# Altium PCB PCB1.PcbDoc (part 3 of 4)
Units mm, origin at the board's own origin, x right, y up, seen from the top; angles counter-clockwise.
Board outline 200 x 55 mm, 4 copper layers (Top Layer, Power Layer, GND Layer, Bottom Layer), stack 1.714 mm thick; 402 components, 269 nets, 1338 pads, 752 vias.
Unrouted connection lines stored in the file: 36.
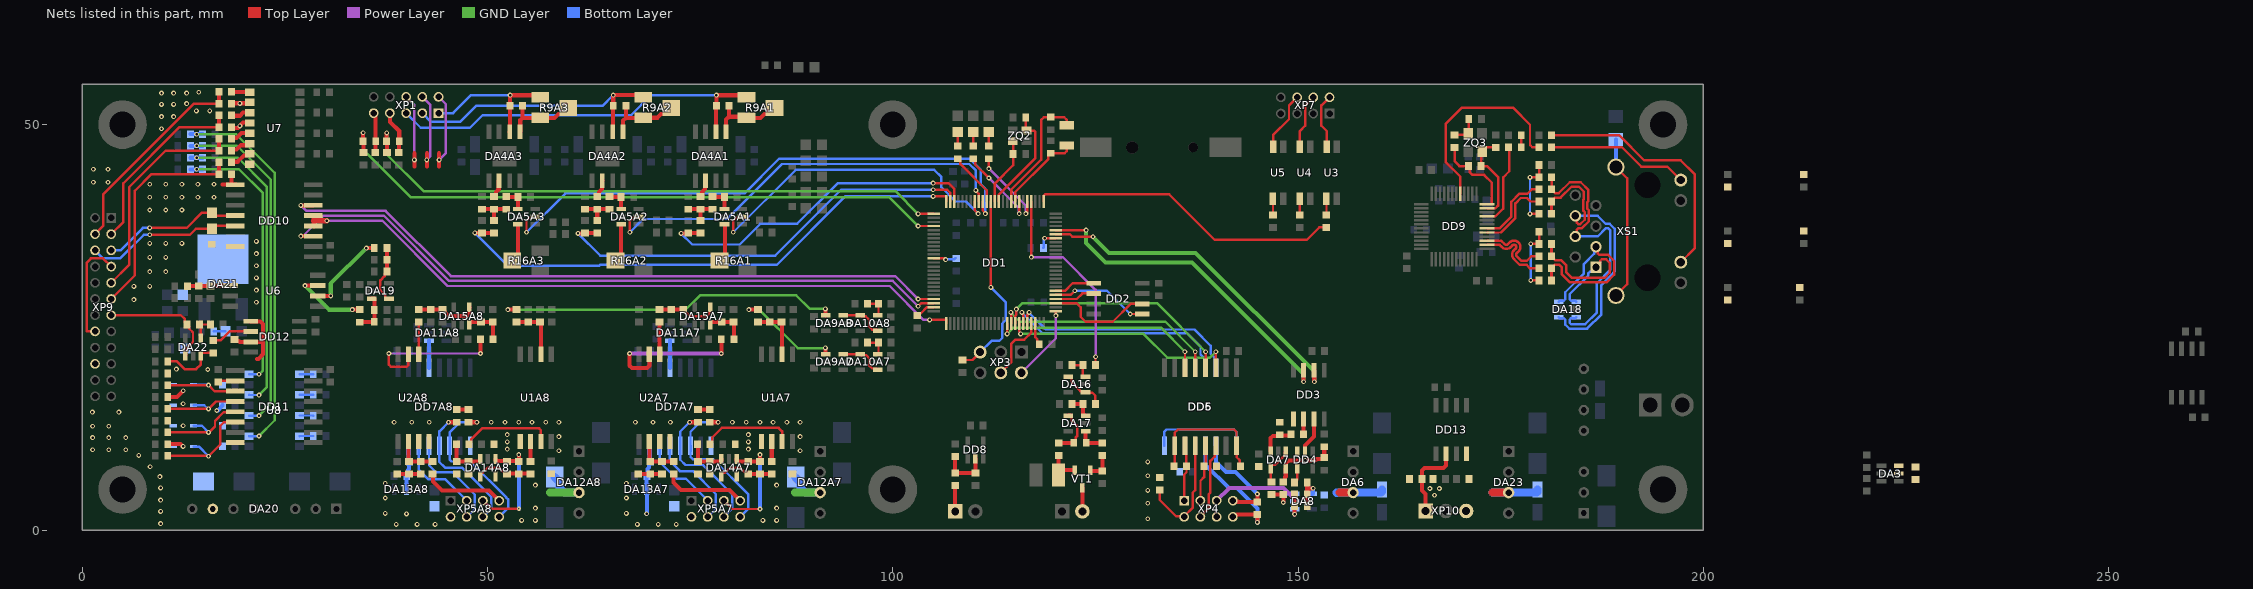
[diagram p5: the nets of this part, all layers, seen from the top]

## Via types
v1: diameter 0.6, hole 0.3, Top Layer to Bottom Layer, tented both sides, 711 vias
v2: diameter 0.6, hole 0.3, Top Layer to Bottom Layer, 36 vias
v3: diameter 0.8, hole 0.4, Top Layer to Bottom Layer, tented both sides, 4 vias
v4: diameter 0.5, hole 0.2, Top Layer to Bottom Layer, tented both sides, 1 vias

## Nets (pads, with @x,y where several pads share a name; then routed paths per layer and width w, separated by ;. In a path a pad name is that pad's centre, name@x,y a point inside that pad or via, vN(x,y) a via of type N, cw(c..) or ccw(c..) an arc to the next point about the centre after c; other vN are vias at no path point) (continued)
GND_DRVA7: C55A7.2 C57A7.2 C59A7.1 C61A7.1 C62A7.2 C64A7.2 C65A7.2 C67A7.2 C68A7.2 DA12A7.3 DA13A7.2 DA14A7.5 DD7A7.9 DD7A7.15 R32A7.2 R37A7.1 R39A7.2 R40A7.2 U1A7.5 U2A7.3 U2A7.4 XP5A7.2 | length 20.3
  Top Layer w0.5: C57A7.2@68.625,6.925 R32A7.2@71.525,6.925 ; R40A7.2@75.975,14.85 R39A7.2@77.425,14.85
  GND Layer w1: 87.965,4.615 DA12A7.3@91.05,4.615
  Bottom Layer w0.5: v1(69.645,2.003) 69.66,2.019 DA13A7.2@69.66,5.025 ; DA13A7.2@69.65,5.025 C67A7.2@69.65,6.65 ; C67A7.2@69.675,6.675 69.769,6.769 69.769,7.542 69.95,7.722 69.95,8.25 C64A7.2@70.125,8.425 ; DD7A7.15@69.975,10.4 70.025,10.35 70.025,8.5 C64A7.2@70.1,8.425
  Bottom Layer w1: C55A7.2@88.015,6.488 88.615,5.888 88.615,5.201 89.201,4.615 DA12A7.3@91.05,4.615
  other v1: 68.5,0.7 71.075,0.7 73.3,0.7 83.975,1.2 85.675,1.2 67.15,2.05 85.675,2.7 67.15,3.95 85.675,5.55 67.15,5.775 88.575,9.775 82.2,9.975 82.2,10.875 88.575,11.525 82.2,11.775 68.25,13.3 70.425,13.3 72.575,13.3 80.225,13.3 81.925,13.3 83.625,13.3 85.25,13.3 86.95,13.3 88.575,13.3
GND_DRVA8: C55A8.2 C57A8.2 C59A8.1 C61A8.1 C62A8.2 C64A8.2 C65A8.2 C67A8.2 C68A8.2 DA12A8.3 DA13A8.2 DA14A8.5 DD7A8.9 DD7A8.15 R32A8.2 R37A8.1 R39A8.2 R40A8.2 U1A8.5 U2A8.3 U2A8.4 XP5A8.2 | length 17.9
  Top Layer w0.5: C57A8.2@38.875,6.925 C59A8.1@40.325,6.925 R32A8.2@41.775,6.925 ; R40A8.2@46.225,14.85 R39A8.2@47.675,14.85
  GND Layer w1: 57.725,4.623 DA12A8.3@61.325,4.623
  Bottom Layer w0.5: DA13A8.2@40.025,5.025 40.025,5.1 C67A8.2@40.025,6.65 ; C67A8.2@40.05,6.725 C67A8.2@40.05,6.675 40.225,6.85 40.225,7.409 40.34,7.524 C64A8.2@40.34,8.36 ; DD7A8.15@40.26,10.4 40.26,8.44 C64A8.2@40.34,8.36 ; C64A8.2@40.375,8.325 C64A8.2@40.34,8.36 ; C64A8.2@40.4,8.425 40.34,8.365 C64A8.2@40.34,8.36
  Bottom Layer w1: C55A8.2@58.3,6.525 58.9,5.925 58.9,5.201 59.486,4.615 DA12A8.3@61.325,4.615
  other v1: 38.75,0.7 41.325,0.7 43.55,0.7 54.225,1.2 55.925,1.2 40.025,2 37.4,2.05 55.925,2.7 37.4,3.95 55.925,5.55 37.4,5.775 58.825,9.775 52.45,9.975 52.45,10.875 58.825,11.525 52.45,11.775 38.5,13.3 40.675,13.3 42.825,13.3 50.475,13.3 52.175,13.3 53.875,13.3 55.5,13.3 57.2,13.3 58.825,13.3
GND_FS: C116.2 C117.2 C118.2 DA23.3 DD13.4 R119.2 XP10.3 | length 7.9
  Top Layer w1: 173.975,4.615 DA23.3@175.975,4.615
  Bottom Layer w1: 173.975,4.615 DA23.3@175.975,4.615 179.425,4.615 179.525,4.715 C118.2@179.525,5
  other v1: 166.825,4.3 166.25,5.125 167.425,5.125
GND_HW: C97.2 C98.2 C107.1 C108.2 C109.2 C110.2 DA20.7 DA21.2 DD10.9 DD10.15 DD11.2 DD11.8 DD12.5 DD12.7 R70.1 R71.1 R73.1 R74.1 R76.1 R77.1 R78.1 R80.1 R111.1 R113.1 R114.1 R115.1 R117.1 R118.1 U7.2 U7.4 U7.6 U7.8 VD4.2 VD5.2 VD6.2 VD7.2 XP9.7 XP9.16 XP9.20 | length 44.6
  Top Layer w0.3: XP9.16@1.6,24.5 0.6,24.5 0.6,33 1.1,33.5 2.6,33.5 XP9.7@3.6,32.5 ; C98.2@16.764,18.4 DD11.2@18.9,18.4 ; R70.1@18.404,52.621 18.534,52.75 U7.2@20.68,52.75 U7.2@20.53,52.6
  Top Layer w0.5: R80.1@10.575,10.6 12.168,10.6 12.448,10.32 v1(12.475,10.32) ; R74.1@10.575,16.4 11.698,16.4 v1(12.477,17.179) ; 17.3,42.6 DD10.9@18.475,42.6 ; R78.1@18.425,43.6 18.425,42.65 DD10.9@18.475,42.6 ; R76.1@18.425,46.65 18.425,46.75 18.6,46.925 19.075,46.925 19.615,47.465 20.475,47.465 U7.6@20.68,47.67 ; R73.1@18.425,49.6 19.223,49.6 19.88,50.257 20.633,50.257 U7.4@20.68,50.21 ; R70.1@18.425,52.6 U7.2@20.53,52.6 ; C108.2@18.8,23.5 18.975,23.325 19.328,23.325 19.453,23.2 DD12.7@20.8,23.2 22.3,23.2 ; DD10.9@19,42.6 DD10.9@18.475,42.6 ; DD12.5@20.8,25.75 20.85,25.7 22.007,25.7 22.3,25.407 22.3,23.2 ; 21.582,21.125 21.741,21.125 22.3,21.684 22.3,23.2
  Bottom Layer w0.3: C109.2@16.25,24.5 17.665,24.5 C107.1@17.7,24.535
  Bottom Layer w0.5: v1(16.621,14.75) 16.64,14.769 16.744,14.769 17.325,15.35 R115.1@17.325,15.4
  other v1: 9.7,0.8 9.7,2.3 9.7,3.7 9.7,5.2 9.6,6.6 8.4,7.8 7,9.2 1.3,9.9 3.3,9.9 5.4,9.9 1.3,11.4 3.3,11.4 5.4,11.4 1.3,12.8 3.3,12.8 12.475,12.86 1.283,14.55 4.537,14.55 12.475,15.575 15.5,19.8 11.632,19.845 21.5,28.1 6.4,28.425 21.5,29.6 6.4,30.05 8.35,30.05 21.5,31.1 8.35,31.875 10.331,31.875 21.5,32.6 8.35,33.625 10.331,33.625 21.5,34.1 8.35,35.35 10.331,35.35 12.312,35.35 21.5,35.6 8.35,39.475 10.331,39.475 12.312,39.475 8.35,41.05 10.331,41.05 12.312,41.05 14.294,41.05 16.275,41.05 8.35,42.65 10.331,42.65 12.312,42.65 14.294,42.65 16.275,42.65 1.4,42.9 3.2,42.9 1.4,44.5 3.2,44.5 9.8,49.5 19.475,49.85 9.8,51 11.3,51 14.1,51.7 15.75,51.7 9.8,52.5 11.3,52.5 12.9,52.6 19.475,52.625 9.8,53.9 11.3,53.9 12.9,53.9 14.4,54
GND_PS: C39.2 C42.2 C43.2 C44.2 C45.2 C46.2 C47.2 C48.2 DA6.3 DA7.5 DA8.2 DD3.5 DD4.3 DD5.2 DD5.8 DD6.9 DD6.16 R21.1 R24.1 R25.2 R26.1 XP4.6 | length 45.4
  Top Layer w0.3: R21.1@134.681,7.875 134.776,7.971 DD5.2@134.776,10.41 134.776,12.013 135.163,12.4 142.124,12.4 142.396,12.128 DD5.8@142.396,10.41 142.424,10.382 142.424,8.985 142.781,8.628 C46.2@142.781,8.325 ; C46.2@142.881,8.15 C46.2@143.156,7.875
  Top Layer w0.5: R25.2@148.175,5.925 148.225,5.925 148.4,6.1 148.4,6.535 148.475,6.61 148.475,7.55 DA7.5@148.5,7.575 ; DA7.5@148.525,7.6 148.525,8.275 148.85,8.6 152.116,8.6 152.266,8.75 153.05,8.75 C43.2@153.225,8.925 C39.2@153.225,10.275
  Top Layer w1: 155.081,4.62 DA6.3@156.781,4.62
  Bottom Layer w0.3: DD6.16@133.506,10.41 133.506,12.15 133.756,12.4 142.124,12.4 142.396,12.128 DD6.9@142.396,10.41
  Bottom Layer w1: 154.75,4.6 154.77,4.62 DA6.3@156.781,4.62 160.25,4.62 160.35,4.72 C45.2@160.35,5
  other v1: 131.456,1.4 131.456,3.3 131.456,4.9 131.456,6.7 131.456,8.4 150.875,8.6
GUIDE_LAS: DD1.4 R43.1 | length 25.7
  Top Layer w0.3: v1(117.1,33.675) DD1.4@117.1,40.525 ; R43.1@125,20.35 125.012,20.362 125.012,21.362 v1(125.025,21.375)
  Power Layer w0.3: v1(117.1,33.675) 120.966,33.675 125.025,29.616 v1(125.025,21.375)
IL1_HW: R70.2 R84.1 XP9.4 | length 25.8
  Top Layer w0.3: XP9.4@1.6,36.5 2.6,37.5 2.6,41.376 13.824,52.6 R70.2@16.949,52.6
  Top Layer w0.5: R70.2@16.875,52.6 R84.1@16.875,54.1
IL2_HW: R73.2 R85.1 XP9.3 | length 23
  Top Layer w0.3: XP9.3@3.6,36.5 5.1,38 5.1,42.77 12.03,49.7 R73.2@16.875,49.7
  Top Layer w0.5: R73.2@16.875,49.6 R85.1@16.875,51.1
KEY_HW: R76.2 R86.1 XP9.9 | length 26.9
  Top Layer w0.3: XP9.9@3.6,30.5 5.8,32.7 5.8,42.279 10.321,46.8 R76.2@16.875,46.8
  Top Layer w0.5: R76.2@16.875,46.8 R86.1@16.875,48.1
LED1: DD1.15 R6.1 | length 6.8
  Top Layer w0.3: R6.1@108.025,45.8 108.068,45.8 108.343,45.525 108.343,45.144 111.6,41.887 DD1.15@111.6,40.525
LED2: DD1.7 R7.1 | length 10.6
  Top Layer w0.3: R7.1@109.935,45.8 110.173,45.562 110.173,45.102 v1(111.85,43.425) ; v1(115.6,39.025) DD1.7@115.6,40.525
  Power Layer w0.3: v1(111.85,43.425) 115.543,39.732 115.543,39.082 v1(115.6,39.025)
LED3: DD1.5 R8.1 | length 10.2
  Top Layer w0.3: v1(111.85,44.575) R8.1@111.85,45.8 ; v1(116.425,39.025) 116.425,39.106 116.6,39.281 DD1.5@116.6,40.525
  Power Layer w0.3: v1(111.85,44.575) 116.425,40 v1(116.425,39.025)
LNKn: DD9.17 R64.2 | length 25.2
  Top Layer w0.3: DD9.17@170,41.5 170,43.6 168.2,45.4 168.2,50.1 170.2,52.1 176.5,52.1 178.6,50 178.6,47.5 178.888,47.212 R64.2@179.725,47.212
MEM_CS: DD1.81 DD2.1 | length 5.1
  Top Layer w0.3: DD1.81@120.125,29.5 121.225,29.5 122.171,30.446 DD2.1@124.796,30.446
MEM_MISO: DD1.79 DD2.2 | length 5
  Top Layer w0.3: DD1.79@120.125,28.5 122.699,28.5 123.394,29.196 DD2.2@124.796,29.196
MEM_MOSI: DD1.80 DD2.5 | length 12.1
  Top Layer w0.3: DD1.80@120.125,29 121.939,29 122.464,29.525 v1(122.475,29.525) ; v1(129.296,26.646) DD2.5@130.796,26.646
  Bottom Layer w0.3: v1(122.475,29.525) 126.416,29.525 v1(129.296,26.646)
MEM_SCLK: DD1.78 DD2.6 | length 13.2
  Top Layer w0.3: DD1.78@120.125,28 122.662,28 123.178,27.484 123.178,26.306 123.795,25.688 127.138,25.688 129.346,27.896 DD2.6@130.796,27.896
MP_EN_HW: R78.2 R87.1 XP9.11 | length 27.3
  Top Layer w0.3: XP9.11@3.6,28.5 6.5,31.4 6.5,41.83 8.57,43.9 R78.2@16.875,43.9
  Top Layer w0.5: R78.2@16.875,43.8 R78.2@16.875,43.9 R87.1@16.875,45.35
NetC7_1: C7.1 DA3.5
NetC7_2: C7.2 DA3.6
NetC16_1: C16.1 DD1.49 | length 2.5
  Top Layer w0.3: C16.1@103.025,26.45 103.3,26.725 103.451,26.725 104.226,27.5 DD1.49@105.075,27.5
NetC18_1: C18.1 DD1.73 | length 2.8
  Top Layer w0.3: DD1.73@117.6,25.475 117.6,23.777 117.808,23.569 117.808,23.167 C18.1@118.075,22.9
NetC27A1_1: C27A1.1 DA4A1.1 R9A1.2 R9A1.3 | length 9.5
  Top Layer w0.5: DA4A1.1@79.45,49.105 79.45,50.63 79.8,50.98 ; C27A1.1@79.8,52.325 79.8,50.98 ; R9A1.2@85.4,52.075 84.65,51.325 84.185,51.325 83.71,50.85 R9A1.3@81.95,50.85 81.82,50.98 79.8,50.98
NetC27A2_1: C27A2.1 DA4A2.1 R9A2.2 R9A2.3 | length 9.5
  Top Layer w0.5: DA4A2.1@66.716,49.105 66.724,49.113 66.724,50.499 67.075,50.85 ; C27A2.1@67.075,52.325 67.075,50.85 ; R9A2.2@72.675,52.075 71.925,51.325 71.425,51.325 70.959,50.859 69.234,50.859 R9A2.3@69.225,50.85 67.075,50.85
NetC27A3_1: C27A3.1 DA4A3.1 R9A3.2 R9A3.3 | length 9.5
  Top Layer w0.5: DA4A3.1@54,49.105 54.05,49.155 54.05,50.575 54.12,50.645 54.19,50.715 54.35,50.875 ; C27A3.1@54.35,52.325 54.35,50.875 ; R9A3.2@59.975,52.075 59.225,51.325 58.775,51.325 58.3,50.85 R9A3.3@56.525,50.85 54.35,50.85 54.35,50.875
NetC33A1_1: C33A1.1 DA5A1.1 R15A1.2 | length 3.1
  Top Layer w0.5: R15A1.2@77.775,41.125 77.8,41.1 79.2,41.1 C33A1.1@79.225,41.075 79.225,39.625 DA5A1.1@79.25,39.6 DA5A1.1@79.4,39.6
NetC33A2_1: C33A2.1 DA5A2.1 R15A2.2 | length 3.1
  Top Layer w0.5: R15A2.2@65.05,41.125 65.075,41.1 66.475,41.1 C33A2.1@66.5,41.075 66.5,39.625 66.525,39.6 DA5A2.1@66.65,39.6
NetC33A3_1: C33A3.1 DA5A3.1 R15A3.2 | length 3
  Top Layer w0.5: R15A3.2@52.325,41.125 52.35,41.1 C33A3.1@53.9,41.1 ; DA5A3.1@53.775,39.625 C33A3.1@53.775,41.075
NetC42_1: C42.1 DA7.3 R19.2 | length 4.5
  Top Layer w0.5: DA7.3@146.6,9.725 146.6,11.329 146.893,11.621 147.596,11.621 C42.1@147.725,11.75 ; C42.1@147.575,11.65 149.1,11.65 R19.2@149.125,11.675
NetC49_1: C49.1 DA8.4 R23.1 R27.2 | length 4.3
  Top Layer w0.5: C49.1@151.125,2.975 R23.1@151.125,5.868 ; 151.168,5.15 v1(151.85,5.15)
  Bottom Layer w0.5: DA8.4@151.725,4.475 151.806,4.475 151.831,4.5 151.831,5.131 v1(151.85,5.15)
NetC49_2: C49.2 DA8.1 R27.1 XP4.5 | length 15.8
  Top Layer w0.5: v1(149.575,1.95) C49.2@149.575,2.975 R27.1@149.575,4.425
  Power Layer w0.5: XP4.5@139.95,3.625 141.509,5.184 148.223,5.184 149.575,3.832 v1(149.575,1.95)
  Bottom Layer w0.5: v1(149.575,1.95) DA8.1@149.575,2.575
NetC50A7_1: C50A7.1 DA10A7.3 R28A7.2 | length 2.8
  Top Layer w0.3: C50A7.1@96.892,23.125 R28A7.2@98.242,23.125 98.242,21.8 DA10A7.3@98.142,21.7
NetC50A8_1: C50A8.1 DA10A8.3 R28A8.2 | length 2.8
  Top Layer w0.3: C50A8.1@96.892,27.9 R28A8.2@98.242,27.9 98.242,26.575 DA10A8.3@98.142,26.475
NetC58A7_2: C58A7.2 R29A7.1 R31A7.1 U1A7.2 | length 6.9
  Top Layer w0.5: R29A7.1@83.375,25.65 86.3,25.65 86.35,25.6 U1A7.2@86.35,21.675
NetC58A8_2: C58A8.2 R29A8.1 R31A8.1 U1A8.2 | length 6.9
  Top Layer w0.5: R29A8.1@53.609,25.638 55.059,25.638 56.509,25.638 56.6,25.547 U1A8.2@56.6,21.675
NetC59A7_2: C59A7.2 R30A7.1 R32A7.1 U2A7.2 | length 5.5
  Top Layer w0.5: U2A7.2@69.975,11.1 69.975,8.475 71.425,8.475 R30A7.1@72.875,8.475
NetC59A8_2: C59A8.2 R30A8.1 R32A8.1 U2A8.2 | length 5.4
  Top Layer w0.5: U2A8.2@40.26,10.925 40.293,10.893 40.293,8.507 C59A8.2@40.325,8.475 R30A8.1@43.225,8.475
NetC65A7_1: C65A7.1 DA14A7.3 R33A7.2 R37A7.2 | length 5.2
  Top Layer w0.5: R33A7.2@75.925,10.575 75.975,10.525 C65A7.1@75.975,8.475 R37A7.2@77.425,8.475 78.725,8.475 78.85,8.6 DA14A7.3@78.85,8.76
NetC65A8_1: C65A8.1 DA14A8.3 R33A8.2 R37A8.2 | length 5.3
  Top Layer w0.5: R33A8.2@46.175,10.575 46.2,10.55 46.2,8.5 C65A8.1@46.225,8.475 R37A8.2@47.675,8.475 49.075,8.475 49.1,8.5 DA14A8.3@49.1,8.76
NetC66A7_1: C66A7.1 DA15A7.3 R34A7.2 R38A7.1 | length 5.2
  Top Layer w0.5: DA15A7.3@77.475,25.325 77.475,25.525 77.6,25.65 R38A7.1@78.9,25.65 C66A7.1@80.35,25.65 80.4,25.6 R34A7.2@80.4,23.55
NetC66A8_1: C66A8.1 DA15A8.3 R34A8.2 R38A8.1 | length 5.2
  Top Layer w0.5: DA15A8.3@47.775,25.325 47.775,25.525 47.9,25.65 R38A8.1@49.2,25.65 C66A8.1@50.65,25.65 50.7,25.6 R34A8.2@50.7,23.55
NetC70A7_1: C70A7.1 DA14A7.4 R35A7.2 R41A7.1 | length 7.2
  Top Layer w0.3: DA14A7.4@78.85,6.61 78.85,6.935 78.975,7.06 79.3,7.06 79.93,7.69 81.171,7.69 81.661,7.2 81.9,7.2 R41A7.1@82.175,6.925
  Top Layer w0.5: R41A7.1@82.175,6.925 C70A7.1@83.625,6.925 R35A7.2@85.075,6.925
NetC70A7_2: C70A7.2 DA14A7.1 R41A7.2 XP5A7.5 | length 15.5
  Top Layer w0.3: XP5A7.5@79.175,3.625 80.2,2.6 v1(83.625,2.6)
  Top Layer w0.5: DA14A7.1@80.75,8.76 80.75,8.6 80.875,8.475 R41A7.2@82.175,8.475 C70A7.2@83.625,8.475 v1(83.625,9.3)
  Bottom Layer w0.5: v1(83.625,2.6) v1(83.625,9.3)
NetC70A8_1: C70A8.1 DA14A8.4 R35A8.2 R41A8.1 | length 7.2
  Top Layer w0.3: DA14A8.4@49.1,6.61 49.1,6.935 49.225,7.06 49.435,7.06 50.075,7.7 51.419,7.7 51.894,7.225 52.15,7.225 R41A8.1@52.425,6.95
  Top Layer w0.5: R41A8.1@52.425,6.95 53.875,6.95 R35A8.2@55.325,6.95
NetC70A8_2: C70A8.2 DA14A8.1 R41A8.2 XP5A8.5 | length 15.4
  Top Layer w0.3: XP5A8.5@49.45,3.625 50.45,2.625 v4(53.875,2.625)
  Top Layer w0.5: DA14A8.1@51,8.76 51,8.625 51.125,8.5 52.425,8.5 53.875,8.5 v1(53.875,9.3)
  Bottom Layer w0.5: v4(53.875,2.625) v1(53.875,9.3)
NetC71A7_1: C71A7.1 DA15A7.4 R36A7.2 R42A7.2 | length 7.5
  Top Layer w0.3: R42A7.2@74.191,27.2 74.466,26.925 74.466,26.875 74.972,26.369 77.069,26.369 77.369,26.669 77.369,27.369 DA15A7.4@77.475,27.475
  Top Layer w0.5: R36A7.2@71.241,27.2 C71A7.1@72.691,27.2 R42A7.2@74.191,27.2
NetC71A8_1: C71A8.1 DA15A8.4 R36A8.2 R42A8.2 | length 7.5
  Top Layer w0.5: R36A8.2@41.548,27.188 C71A8.1@42.998,27.188 ; C71A8.1@43.01,27.2 R42A8.2@44.5,27.2 ; R42A8.2@44.45,27.2 R42A8.2@44.5,27.2 ; DA15A8.4@47.775,27.475 47.75,27.45 47.75,26.718 47.457,26.425 45.225,26.425 44.675,26.975 44.675,27.025 R42A8.2@44.5,27.2
NetC72_1: C72.1 DA16.3 R43.2 | length 3.1
  Top Layer w0.3: C72.1@122.075,20.35 123.425,20.35 123.425,19.038 123.55,18.913 DA16.3@123.787,18.913
NetC75_1: C75.1 DA17.1 R46.1 | length 3.5
  Top Layer w0.5: DA17.1@123.8,12.2 123.8,10.828 C75.1@123.871,10.757 R46.1@125.85,10.757 R46.1@125.871,10.757
NetC75_2: C75.2 DA17.4 R47.1 | length 6.1
  Top Layer w0.3: DA17.4@121.65,14.207 121.975,14.207 122.1,14.082 122.1,13.907 122.1,13.5 122.731,12.869 122.731,11.583 122.596,11.447 122.596,11.032 C75.2@122.321,10.757
  Top Layer w0.5: R47.1@120.471,10.757 C75.2@122.321,10.757
NetC76_1: C76.1 DD8.2 R53.2 R54.1 | length 6.3
  Top Layer w0.5: R54.1@107.7,9.05 R53.2@107.7,7.05 C76.1@110.2,7.05 DD8.2@110.2,8.8
NetC79_1: C79.1 XS1.13 XS1.14 | length 20.4
  Top Layer w0.3: XS1.13@189.2,28.932 190.6,30.332 190.6,43.372 XS1.14@189.2,44.772
  Bottom Layer w0.5: XS1.14@189.2,44.772 C79.1@189.2,48.2
NetC81_1: C81.1 R55.2 R56.2 | length 8.1
  Top Layer w0.3: v1(178.7,30.8) 179.703,30.8 R55.2@179.725,30.778 ; v1(178.7,35.3) 179.703,35.3 R56.2@179.725,35.278 C81.1@179.725,36.778
  Bottom Layer w0.3: v1(178.7,30.8) v1(178.7,35.3)
NetC82_1: C82.1 R57.2 R58.2 | length 8.3
  Top Layer w0.3: v1(178.6,39) 179.7,39 R57.2@179.725,39.025 ; v1(178.6,43.5) 179.7,43.5 R58.2@179.725,43.525 C82.1@179.725,45.025
  Bottom Layer w0.3: v1(178.6,39) v1(178.6,43.5)
NetC86_1: C86.1 R68.2 ZQ3.3 | length 3.6
  Top Layer w0.3: R68.2@169.3,48.75 170.825,48.75 ZQ3.3@170.975,48.9 171.05,48.975 C86.1@171.05,50.7
NetC96_2: C96.2 R75.1 R79.1 U6.2 | length 5.3
  Top Layer w0.5: R75.1@12.991,30.075 13.041,30.125 R79.1@14.341,30.125 ; R79.1@14.391,30.125 C96.2@15.841,30.125 ; C96.2@15.866,30.15 U6.2@18.3,30.15
NetC101_1: C101.1 DA19.3 R92.2 R96.1 | length 5
  Top Layer w0.5: R92.2@34.25,25.632 34.275,25.657 36.025,25.657 C101.1@36.05,25.682 R96.1@36.05,27.132 36.05,28.532 36.025,28.557 DA19.3@35.725,28.557
NetC104_1: C104.1 DA19.4 R95.2 R97.2 | length 7.2
  Top Layer w0.3: R97.2@37.6,31.882 37.325,31.607 37.325,31.316 36.8,30.791 36.8,29.532 37.425,28.907 37.425,28.682 37.55,28.557 DA19.4@37.875,28.557
  Top Layer w0.5: R97.2@37.6,31.882 C104.1@37.6,33.332 R95.2@37.6,34.782
NetC111_1: C111.1 DA22.3 R102.2 | length 7.4
  Top Layer w0.3: C111.1@10.575,20.8 11.7,20.8 12.65,19.85 14.075,19.85 14.658,20.433 DA22.3@14.658,21.5 ; DA22.3@14.658,21.725 14.783,21.85 R102.2@16.2,21.85
NetDA4A1_6: DA4A1.6 R12A1.1 | length 2.2
  Top Layer w0.5: R12A1.1@76.358,41.158 76.5,41.3 76.5,41.701 76.85,42.051 76.85,43.055 DA4A1.6@76.9,43.105
NetDA4A2_6: DA4A2.6 R12A2.1 | length 2.3
  Top Layer w0.5: R12A2.1@63.55,41.125 63.725,41.3 63.775,41.3 63.775,41.701 64.116,42.042 64.116,43.056 DA4A2.6@64.166,43.106
NetDA4A3_6: DA4A3.6 R12A3.1 | length 2.3
  Top Layer w0.5: R12A3.1@50.825,41.125 50.875,41.125 51.05,41.3 51.05,41.687 51.4,42.037 51.4,43.055 DA4A3.6@51.45,43.105
NetDA5A1_3: DA5A1.3 R16A1.2 | length 4.1
  Top Layer w0.5: R16A1.2@79,33.675 79.3,33.975 DA5A1.3@79.3,37.7
NetDA5A2_3: DA5A2.3 R16A2.2 | length 4.8
  Top Layer w0.5: R16A2.2@65.836,33.186 66.5,33.85 DA5A2.3@66.5,37.7
NetDA5A3_3: DA5A3.3 R16A3.2 | length 4.8
  Top Layer w0.5: R16A3.2@53.075,33.25 53.175,33.25 53.75,33.825 DA5A3.3@53.75,37.7
NetDA7_1: DA7.1 DA7.4 R20.2 | length 4.9
  Top Layer w0.3: R20.2@146.725,5.925 146.6,6.05 146.6,7.9 146.725,8.025 147.149,8.025 148.375,9.251 148.375,9.6 DA7.1@148.5,9.725
NetDA8_3: DA8.3 R20.1 R25.1 | length 4.6
  Top Layer w0.5: R20.1@146.625,4.375 R20.1@146.725,4.375 R25.1@148.125,4.375 ; v1(148.175,3.4) R25.1@148.175,4.375
  Bottom Layer w0.3: v1(148.175,3.4) 148.175,3.9 148.707,4.432 149.532,4.432 DA8.3@149.575,4.475
NetDA9A7_3: DA9A7.3 DA10A7.1 DA10A7.4 | length 5.7
  Top Layer w0.3: DA9A7.3@93.75,21.7 DA10A7.4@95.992,21.7 96.117,21.575 96.717,21.575 97.077,21.215 97.077,20.315 97.467,19.925 98.017,19.925 DA10A7.1@98.142,19.8
NetDA9A7_4: DA9A7.4 R29A7.2 | length 13.4
  Top Layer w0.5: v1(82.25,27.2) R29A7.2@83.375,27.2 ; v1(91.7,22.475) 91.719,22.456 91.719,21.725 91.744,21.7 DA9A7.4@91.75,21.7
  GND Layer w0.3: v1(82.25,27.2) 83.524,27.2 88.299,22.425 91.65,22.425 v1(91.7,22.475)
NetDA9A8_3: DA9A8.3 DA10A8.1 DA10A8.4 | length 5.7
  Top Layer w0.3: DA9A8.3@93.75,26.475 DA10A8.4@95.992,26.475 ; DA10A8.4@95.992,26.475 96.117,26.35 96.667,26.35 97.067,25.95 97.067,25.1 97.467,24.7 98.017,24.7 DA10A8.1@98.142,24.575
NetDA9A8_4: DA9A8.4 R29A8.2 | length 42.5
  Top Layer w0.5: v1(52.525,27.2) R29A8.2@53.6,27.2 ; v1(91.7,27.275) 91.712,27.263 91.712,26.487 DA9A8.4@91.725,26.475
  GND Layer w0.3: v1(52.525,27.2) 74.471,27.2 76.221,28.95 88.1,28.95 89.775,27.275 v1(91.7,27.275)
NetDA11A7_4: DA11A7.4 DD7A7.4 | length 3.4
  Bottom Layer w0.5: DD7A7.4@72.515,20 DA11A7.4@72.515,23.36
NetDA11A8_4: DA11A8.4 DD7A8.4 | length 3.4
  Bottom Layer w0.5: DD7A8.4@42.8,20 DA11A8.4@42.8,23.375
NetDA16_1: DA16.1 DA16.4 R44.1 | length 5.7
  Top Layer w0.3: DA16.4@121.637,18.913 121.954,18.913 122.079,18.788 122.079,18.196 123.137,17.138 123.662,17.138 DA16.1@123.787,17.013 123.868,16.933 124.618,16.933 124.987,16.563 ; R44.1@125,15.55 125,16.563
NetDA17_3: DA17.3 R44.2 R45.1 | length 3.1
  Top Layer w0.5: R45.1@122.1,15.55 R44.2@123.45,15.55 123.45,14.125 123.475,14.1 DA17.3@123.8,14.1
NetDA22_4: DA22.4 R112.2 R116.1 | length 3.2
  Top Layer w0.3: DA22.4@14.658,23.65 14.658,25.197 R116.1@14.505,25.35 15.949,25.35 R112.2@15.966,25.333
NetDD1_37: DD1.37 R4.1 | length 2.8
  Top Layer w0.3: DD1.37@105.075,33.5 106.302,33.5 106.452,33.35 v1@106.529,33.35
  Bottom Layer w0.3: v1@106.529,33.35 106.586,33.407 107.611,33.407 R4.1@107.759,33.556
  other v1: 106.525,33.35
NetDD1_94: DD1.94 R5.1 | length 2.7
  Top Layer w0.3: v1(118.725,36) 119.5,36 DD1.94@120.125,36
  Bottom Layer w0.3: R5.1@118.575,34.8 118.65,34.875 118.65,35.925 v1(118.725,36)
NetDD3_6: DD3.6 R19.1 | length 2
  Top Layer w0.5: R19.1@150.675,11.7 DD3.6@150.675,13.7
NetDD3_7: DD3.7 DD4.2 | length 4.4
  Top Layer w0.5: DD4.2@150.85,9.725 150.875,9.75 150.875,10.45 151.975,11.55 DD3.7@151.975,13.7
NetDD4_4: DD4.4 R23.2 | length 1.8
  Top Layer w0.3: R23.2@149.625,5.925 149.9,6.2 DD4.4@149.9,7.575
NetDD5_3: DD5.3 R21.2 XP4.1 | length 6.9
  Top Layer w0.3: XP4.1@135.956,3.7 135.956,6.85 136.231,7.124 R21.2@136.231,7.875 136.184,7.922 136.184,10.272 DD5.3@136.046,10.41
NetDD5_4: DD5.4 R24.2 XP4.2 | length 14.4
  Top Layer w0.3: R24.2@132.931,4.95 132.931,3.725 134.956,1.7 135.956,1.7 136.98,2.724 136.98,4.599 137.316,4.935 DD5.4@137.316,10.41
NetDD5_5: DD5.5 R26.2 XP4.3 | length 7
  Top Layer w0.3: XP4.3@137.956,3.7 137.956,6.075 138.406,6.525 R26.2@138.406,7.875 138.586,8.055 DD5.5@138.586,10.41
NetDD5_6: DD5.6 XP4.4 | length 9.5
  Top Layer w0.3: XP4.4@137.956,1.7 138.956,2.7 138.956,4.4 139.185,4.629 139.185,8.527 139.706,9.049 139.706,10.26 DD5.6@139.856,10.41
NetDD6_11: DD6.11 R22.1 XP4.7 | length 12.8
  Top Layer w0.5: XP4.7@141.95,3.625 142.084,3.491 142.577,3.491 142.593,3.475 R22.1@144.925,3.475 ; R22.1@144.975,3.475 v1(144.975,4.45)
  Bottom Layer w0.5: DD6.11@139.856,10.41 DD6.11@139.856,10.4 139.856,8.375 141.081,7.15 142.275,7.15 v1(144.975,4.45)
NetDD6_12: DD6.12 R22.2 XP4.8 | length 16.8
  Top Layer w0.5: XP4.8@141.95,1.625 142.139,1.625 142.439,1.925 R22.2@144.975,1.925 v1(144.975,0.95)
  Bottom Layer w0.5: DD6.12@138.586,10.41 DD6.12@138.586,10.4 138.586,8.043 141.455,5.175 142.45,5.175 144.975,2.65 v1(144.975,0.95)
NetDD7A7_11: DD7A7.11 R39A7.1 XP5A7.8 | length 20.3
  Top Layer w0.5: R39A7.1@77.425,13.3 v1(78.45,13.3)
  Bottom Layer w0.3: DD7A7.11@75.055,9.727 75.055,9.025 75.341,8.74 77.86,8.74 82.197,4.403 82.197,2.647 XP5A7.8@81.175,1.625 ; DD7A7.11@75.055,10.4 75.055,12.122 76.233,13.3 v1(78.45,13.3) ; DD7A7.11@75.085,9.727 DD7A7.11@75.085,10.4
NetDD7A7_12: DD7A7.12 R40A7.1 XP5A7.6 | length 17.5
  Top Layer w0.5: v1(74.95,13.3) R40A7.1@75.975,13.3
  Bottom Layer w0.3: v1(74.95,13.3) 73.785,12.135 DD7A7.12@73.785,10.4 73.785,8.665 74.425,8.025 76.575,8.025 80.188,4.412 80.188,2.638 XP5A7.6@79.175,1.625
NetDD7A7_13: DD7A7.13 XP5A7.4 | length 12.7
  Bottom Layer w0.3: DD7A7.13@72.515,10.6 72.515,8.51 73.75,7.275 75.35,7.275 78.175,4.45 78.175,2.625 XP5A7.4@77.175,1.625
NetDD7A7_14: DD7A7.14 XP5A7.3 | length 10.1
  Bottom Layer w0.3: DD7A7.14@71.245,10.6 71.245,8.422 73.342,6.325 74.475,6.325 XP5A7.3@77.175,3.625
NetDD7A8_11: DD7A8.11 R39A8.1 XP5A8.8 | length 20.1
  Top Layer w0.5: R39A8.1@47.675,13.3 v1(48.7,13.3)
  Bottom Layer w0.3: v1(48.7,13.3) 46.599,13.3 45.34,12.041 45.34,8.71 45.594,8.456 47.892,8.456 52.35,3.998 52.35,3.981 52.55,3.781 52.55,2.725 XP5A8.8@51.45,1.625
NetDD7A8_12: DD7A8.12 R40A8.1 XP5A8.6 | length 17.5
  Top Layer w0.5: v1(45.2,13.3) R40A8.1@46.225,13.3
  Bottom Layer w0.3: v1(45.2,13.3) 44.07,12.17 44.07,10.42 44.05,10.4 44.05,8.425 44.775,7.7 46.883,7.7 50.45,4.133 50.45,2.625 XP5A8.6@49.45,1.625
NetDD7A8_13: DD7A8.13 XP5A8.4 | length 12.6
  Bottom Layer w0.3: DD7A8.13@42.801,10.299 42.801,7.999 43.675,7.125 45.675,7.125 48.45,4.35 48.45,2.625 XP5A8.4@47.45,1.625
NetDD7A8_14: DD7A8.14 XP5A8.3 | length 10.4
  Bottom Layer w0.3: DD7A8.14@41.53,10.4 41.53,7.47 42.75,6.25 44.825,6.25 XP5A8.3@47.45,3.625
NetDD9_9: DD9.9 R67.2 | length 10.2
  Top Layer w0.3: DD9.9@173.3,38.7 174.05,38.7 174.345,38.7 175.3,39.655 175.3,43.5 176.051,44.251 R67.2@176.051,47.126
NetDD11_3: DD11.3 R88.2 VD7.1 | length 10.5
  Top Layer w0.3: R88.2@10.575,17.85 10.6,17.875 v1(15.6,17.875) 16.375,17.1 18.87,17.1 DD11.3@18.9,17.13
  Bottom Layer w0.3: VD7.1@13.75,17.94 13.782,17.908 15.567,17.908 v1(15.6,17.875)
NetDD11_4: DD11.4 R82.2 VD6.1 | length 10.7
  Top Layer w0.3: R82.2@10.575,14.95 v1(15.6,14.95) 16.51,15.86 DD11.4@18.9,15.86
  Bottom Layer w0.3: VD6.1@13.75,15.4 15.069,15.4 15.519,14.95 v1(15.6,14.95)
NetDD11_5: DD11.5 R89.2 VD5.1 | length 12
  Top Layer w0.3: R89.2@10.575,12.05 15.681,12.05 16.4,12.769 16.4,13.47 17.476,14.546 18.856,14.546 DD11.5@18.9,14.59
  Bottom Layer w0.3: VD5.1@13.75,12.86 14.79,12.86 v1(15.6,12.05)
NetDD11_6: DD11.6 R83.2 VD4.1 | length 13.8
  Top Layer w0.3: R83.2@10.575,9.15 15.55,9.15 v1(15.6,9.1) 17.05,10.55 17.05,12.85 17.476,13.276 18.856,13.276 DD11.6@18.9,13.32
  Bottom Layer w0.3: VD4.1@13.75,10.3 13.758,10.292 14.408,10.292 v1(15.6,9.1)
NetDD12_6: DD12.6 R102.1 | length 5.1
  Top Layer w0.3: R102.1@16.2,23.4 17.09,23.4 18.19,24.5 DD12.6@20.8,24.5
NetDD13_2: DD13.2 R119.1 XP10.1 | length 9.9
  Top Layer w0.5: XP10.1@165.725,2.35 165.725,4.425 165.275,4.875 165.275,7.357 165.568,7.65 167.946,7.65 168.239,7.943 DD13.2@168.239,9.4
NetR6_2: R6.2 VD1.1 | length 1.8
  Top Layer w0.3: R6.2@108.025,47.35 VD1.1@108.025,49.1
NetR7_2: R7.2 VD2.1 | length 1.7
  Top Layer w0.3: R7.2@109.935,47.35 VD2.1@109.935,49.1
NetR8_2: R8.2 VD3.1 | length 1.8
  Top Layer w0.3: R8.2@111.85,47.31 VD3.1@111.85,49.11
NetR12A1_2: R12A1.2 R13A1.1 R14A1.1 R15A1.1 | length 4.3
  Top Layer w0.5: R13A1.1@74.775,39.575 R12A1.2@76.275,39.575 R15A1.1@77.775,39.575 ; R14A1.1@76.275,38.175 R12A1.2@76.275,39.48
NetR12A2_2: R12A2.2 R13A2.1 R14A2.1 R15A2.1 | length 4.4
  Top Layer w0.5: R13A2.1@62.05,39.575 R12A2.2@63.525,39.575 ; R14A2.1@63.55,38.175 R12A2.2@63.55,39.575 R15A2.1@65.05,39.575
NetR12A3_2: R12A3.2 R13A3.1 R14A3.1 R15A3.1 | length 4.6
  Top Layer w0.5: R13A3.1@49.325,39.575 R12A3.2@50.825,39.575 R15A3.1@52.325,39.575 ; R14A3.1@50.825,38.175 50.825,39.525 R12A3.2@51,39.7
NetR30A7_2: R30A7.2 XP5A7.7 | length 10.2
  Top Layer w0.5: R30A7.2@72.975,6.925 72.975,5.85 73.89,4.935 79.865,4.935 XP5A7.7@81.175,3.625
NetR30A8_2: R30A8.2 XP5A8.7 | length 10.1
  Top Layer w0.5: R30A8.2@43.225,6.925 43.225,6.791 43.266,6.75 43.266,5.984 44.375,4.875 50.2,4.875 XP5A8.7@51.45,3.625
NetR33A7_1: R33A7.1 U1A7.7 | length 11.3
  Top Layer w0.3: R33A7.1@77.475,10.575 77.75,10.85 77.75,11.445 78.905,12.6 85.925,12.6 86.35,12.175 U1A7.7@86.35,11.1
NetR33A8_1: R33A8.1 U1A8.7 | length 11.4
  Top Layer w0.3: R33A8.1@47.725,10.575 48,10.85 48,11.179 49.357,12.536 56.37,12.536 56.6,12.306 U1A8.7@56.6,10.925
NetR34A7_1: R34A7.1 U2A7.7 | length 18.6
  Top Layer w0.5: v1(67.55,21.775) 67.55,20.268 67.843,19.975 69.682,19.975 69.975,20.268 U2A7.7@69.975,21.675 ; v1(78.85,21.775) R34A7.1@78.85,23.55
  Power Layer w0.5: v1@67.577,21.775 v1(78.85,21.775)
NetR34A8_1: R34A8.1 U2A8.7 | length 18.3
  Top Layer w0.3: v1(37.85,21.775) 37.85,20.404 38.087,20.167 40.084,20.167 40.26,20.343 U2A8.7@40.26,21.675
  Top Layer w0.5: v1@49.15,21.795 R34A8.1@49.15,23.55
  Power Layer w0.3: v1(37.85,21.775) v1(49.15,21.775)
NetR35A7_1: R35A7.1 U1A7.6 | length 2.6
  Top Layer w0.5: R35A7.1@85.075,8.475 U1A7.6@85.075,11.1
NetR35A8_1: R35A8.1 U1A8.6 | length 2.4
  Top Layer w0.5: R35A8.1@55.325,8.5 U1A8.6@55.325,10.925
NetR36A7_1: R36A7.1 U2A7.6 | length 4
  Top Layer w0.5: U2A7.6@71.25,21.675 R36A7.1@71.25,25.65
NetR36A8_1: R36A8.1 U2A8.6 | length 4
  Top Layer w0.3: U2A8.6@41.548,21.675 R36A8.1@41.548,25.638
NetR46_2: R46.2 R48.2 VT1.1 | length 3.5
  Top Layer w0.5: VT1.1@124.346,7.382 124.421,7.307 R48.2@125.871,7.307 ; R48.2@125.85,7.307 R46.2@125.85,9.207
NetR47_2: R47.2 R49.2 VT1.2 | length 4.6
  Top Layer w0.5: R49.2@120.446,6.782 R49.2@120.471,6.807 ; R47.2@120.471,9.207 R49.2@120.471,6.807 ; VT1.2@122.446,7.382 121.046,7.382 R49.2@120.471,6.807
NetR50_1: R50.1 U3.1 | length 2
  Top Layer w0.3: R50.1@153.475,38.875 153.475,38.95 153.5,38.975 U3.1@153.5,40.875
NetR51_1: R51.1 U4.1 | length 2
  Top Layer w0.3: R51.1@150.2,38.875 150.2,38.95 U4.1@150.2,40.875
NetR52_1: R52.1 U5.1 | length 2
  Top Layer w0.3: R52.1@146.9,38.875 146.9,38.95 U5.1@146.9,40.875
NetR53_1: R53.1 XP8.1 | length 3.2
  Top Layer w0.5: XP8.1@107.7,2.3 R53.1@107.7,5.5
NetR61_1: R61.1 XS1.10 | length 31.2
  Top Layer w0.3: R61.1@181.275,48.712 189.588,48.712 192.7,45.6 197.2,45.6 198.9,43.9 198.9,34.74 XS1.10@197.2,33.04
NetR64_1: R64.1 XS1.12 | length 17.6
  Top Layer w0.3: R64.1@181.275,47.212 189.947,47.212 192.326,44.832 195.538,44.832 XS1.12@197.2,43.17
NetR65_2: R65.2 R67.1 | length 1.5
  Top Layer w0.3: R67.1@177.525,47.212 R65.2@177.525,48.712
NetR84_2: R84.2 U7.1 | length 2.3
  Top Layer w0.3: R84.2@18.425,54.05 R84.2@18.456,54.019
  Top Layer w0.5: R84.2@18.455,54.02 U7.1@20.68,54.02
NetR85_2: R85.2 U7.3 | length 2.4
  Top Layer w0.5: R85.2@18.425,51.1 19.475,51.1 19.88,51.505 20.655,51.505 U7.3@20.68,51.48
NetR86_2: R86.2 U7.5 | length 2.6
  Top Layer w0.5: R86.2@18.425,48.15 18.425,48.2 18.6,48.375 19.075,48.375 19.653,48.953 20.667,48.953 U7.5@20.68,48.94
NetR87_2: R87.2 U7.7 | length 2.8
  Top Layer w0.5: R87.2@18.425,45.25 R87.2@18.425,45.355 ; R87.2@18.425,45.255 18.6,45.43 19.205,45.43 19.97,46.195 20.475,46.195 U7.7@20.68,46.4
NetR92_1: R92.1 U6.7 | length 9.5
  Top Layer w0.5: v1(27.5,30.15) U6.7@29.05,30.15 ; v1(33.35,27.182) R92.1@34.25,27.182
  GND Layer w0.5: v1(27.5,30.15) 30.475,27.175 33.343,27.175 v1(33.35,27.182)
NetR95_1: R95.1 U6.6 | length 10.3
  Top Layer w0.5: U6.6@29.05,28.875 v1(30.675,28.875) ; v1(35.075,34.782) 36.004,34.782 R95.1@36.027,34.759
  GND Layer w0.5: v1(30.675,28.875) 30.675,30.382 v1(35.075,34.782)
NetR98_1: R98.1 U8.1 | length 1.7
  Bottom Layer w0.3: U8.1@26.82,19.21 28.515,19.21 R98.1@28.525,19.2
NetR99_1: R99.1 U8.3 | length 1.7
  Bottom Layer w0.3: U8.3@26.82,16.67 28.495,16.67 R99.1@28.525,16.7
NetR100_1: R100.1 U8.5 | length 1.7
  Bottom Layer w0.3: U8.5@26.82,14.13 28.495,14.13 R100.1@28.525,14.1
NetR101_1: R101.1 U8.7 | length 1.7
  Bottom Layer w0.3: U8.7@26.82,11.59 26.83,11.6 R101.1@28.525,11.6
NetR103_1: R103.1 R107.1 U8.16 | length 34.7
  GND Layer w0.3: v1(14.123,44.5) 19.358,44.5 22.3,41.558 22.3,19.673 21.852,19.225 v1(21.825,19.225)
  Bottom Layer w0.3: U8.16@20.6,19.21 20.608,19.218 21.818,19.218 v1(21.825,19.225)
  Bottom Layer w0.5: R107.1@13.375,44.475 13.388,44.487 14.111,44.487 v1(14.123,44.5) ; v1@14.123,44.475 R103.1@14.875,44.475
NetR104_1: R104.1 R108.1 U8.14 | length 39
  GND Layer w0.3: v1(14.123,45.918) 19.231,45.918 22.775,42.375 22.775,17.6 v1(21.825,16.65)
  Bottom Layer w0.3: U8.14@20.6,16.67 20.61,16.66 21.815,16.66 v1(21.825,16.65)
  Bottom Layer w0.5: R108.1@13.375,45.925 R104.1@14.875,45.925
NetR105_1: R105.1 R109.1 U8.12 | length 43.3
  GND Layer w0.3: v1(14.123,47.4) 19.102,47.4 23.275,43.227 23.275,15.575 v1(21.825,14.125)
  Bottom Layer w0.3: U8.12@20.605,14.125 v1(21.825,14.125)
  Bottom Layer w0.5: R109.1@13.375,47.375 13.387,47.387 14.111,47.387 v1(14.123,47.4) ; v1@14.123,47.375 R105.1@14.875,47.375
NetR106_1: R106.1 R110.1 U8.10 | length 47.5
  GND Layer w0.3: v1(14.123,48.818) 19.005,48.818 23.775,44.049 23.775,13.55 v1(21.825,11.6)
  Bottom Layer w0.3: U8.10@20.6,11.59 20.605,11.595 21.695,11.595 v1@21.7,11.6
  Bottom Layer w0.5: R110.1@13.375,48.825 R106.1@14.875,48.825
NetU3_4: U3.4 XP7.2 | length 6.8
  Top Layer w0.3: U3.4@153.525,47.275 153.525,49.225 152.875,49.875 152.875,52.375 XP7.2@153.875,53.375
NetU4_4: U4.4 XP7.4 | length 6.8
  Top Layer w0.3: U4.4@150.225,47.275 150.225,49.225 150.878,49.878 150.878,52.378 XP7.4@151.875,53.375
NetU5_4: U5.4 XP7.6 | length 7.3
  Top Layer w0.3: U5.4@146.925,47.275 146.925,48.725 148.875,50.675 148.875,52.375 XP7.6@149.875,53.375
NetVT1_3: VT1.3 XP6.2 | length 3
  Top Layer w0.3: XP6.2@123.371,2.257 XP6.2@123.396,2.282
  Top Layer w0.5: XP6.2@123.396,2.282 VT1.3@123.396,5.232
NRST: C21.1 DD1.14 XP3.5 | length 23.7
  Top Layer w0.3: C21.1@108.708,20.975 109.82,20.975 XP3.5@110.785,21.94 ; DD1.14@112.1,40.525 112.1,29.939 v1(112.112,29.928)
  Bottom Layer w0.3: XP3.5@110.785,21.94 112.178,23.333 113.133,23.333 113.5,23.7 113.5,25.457 113.925,25.882 113.925,28.114 v1(112.112,29.928)
OSC0: C23.1 DD1.12 ZQ2.1 | length 13.3
  Top Layer w0.3: DD1.12@113.1,40.525 113.1,41.375 117.6,45.875 117.6,49.099 117.424,49.275 ZQ2.1@116.5,49.275 116.4,49.375 C23.1@116.4,50.875
OSC1: C25.1 DD1.13 ZQ2.3 | length 8.4
  Top Layer w0.3: DD1.13@112.6,40.525 112.6,42.75 114.85,45 114.85,46.225 C25.1@114.775,46.3 ; ZQ2.3@114.8,47.975 114.85,47.925 C25.1@114.85,46.375
OSC32_0: C22.1 DD1.8 ZQ1.1 | length 10.5
  Top Layer w0.3: DD1.8@115.1,40.525 115.1,41.675 119.207,45.782 119.207,46.2 119.482,46.475 121.2,46.475 121.45,46.725 ZQ1.1@121.45,47.425
OSC32_1: C24.1 DD1.9 ZQ1.2 | length 15.7
  Top Layer w0.3: DD1.9@114.6,40.525 114.6,41.978 118.3,45.678 118.3,50.575 118.65,50.925 C24.1@119.5,50.925 121.15,50.925 121.45,50.625 ZQ1.2@121.45,49.925
PD1_A: R10A3.2 R11A3.1 XP1.2 | length 10.1
  Top Layer w0.5: 44.05,44.85 v1(44.05,45.662) 44.05,46.475
  Power Layer w0.3: XP1.2@43.975,53.425 44.875,52.525 44.875,46.488 v1(44.05,45.662)
PD1_ADC: C32A3.1 DD1.25 R14A3.2 | length 66.4
  Top Layer w0.3: v1(48.45,36.645) v1@48.46,36.635 ; R14A3.2@50.815,36.635 R14A3.2@50.825,36.625 ; v1(104.975,41.15) 106.6,41.15 DD1.25@106.6,40.525
  Top Layer w0.5: v1@48.46,36.635 R14A3.2@50.815,36.635
  Bottom Layer w0.3: v1(48.45,36.645) 52.472,32.623 63.825,32.623 63.926,32.725 85.7,32.725 94.125,41.15 v1(104.975,41.15)
PD1_C: C27A3.2 DA4A3.2 R9A3.1 XP1.1 | length 18.2
  Top Layer w0.5: DA4A3.2@52.75,49.105 52.775,49.13 52.775,52.3 C27A3.2@52.8,52.325 v1(52.8,53.65) 52.819,53.631 56.269,53.631 R9A3.1@56.525,53.375
  Bottom Layer w0.3: XP1.1@43.975,51.425 45.775,51.425 48,53.65 v1(52.8,53.65)
PD1_ERR: DA5A3.5 DD1.16 | length 70.3
  Top Layer w0.3: v1(54.825,36.725) 54.825,38.114 55.236,38.525 55.775,38.525 DA5A3.5@55.9,38.65 ; DD1.16@111.1,40.525 111.1,39.431 111.425,39.106 v1(111.425,39.025)
  Bottom Layer w0.3: v1(54.825,36.725) 59.625,41.525 81.693,41.525 85.993,45.825 109.449,45.825 110.875,44.399 110.875,42.612 111.425,42.062 v1(111.425,39.025)
PD2_A: R10A2.2 R11A2.1 XP1.4 | length 10.1
  Top Layer w0.5: 42.525,44.85 v1(42.525,45.662) 42.525,46.475
  Power Layer w0.3: XP1.4@41.975,53.425 42.975,52.425 42.975,46.112 v1(42.525,45.662) v1@42.437,45.575
PD2_ADC: C32A2.1 DD1.24 R14A2.2 | length 54.1
  Top Layer w0.3: v1(104.975,41.975) 106.725,41.975 107.1,41.6 DD1.24@107.1,40.525
  Top Layer w0.5: v1(61.175,36.6) 62.05,36.6 C32A2.1@62.075,36.575 ; C32A2.1@62.05,36.625 R14A2.2@63.55,36.625
  Bottom Layer w0.3: v1(61.175,36.6) 63.925,33.85 85.5,33.85 93.625,41.975 v1(104.975,41.975)
PD2_C: C27A2.2 DA4A2.2 R9A2.1 XP1.3 | length 33.8
  Top Layer w0.5: DA4A2.2@65.466,49.105 65.466,52.266 C27A2.2@65.525,52.325 v1(65.525,53.65) 68.9,53.65 R9A2.1@69.225,53.325
  Bottom Layer w0.3: XP1.3@41.975,51.425 43.05,50.35 46.624,50.35 48.599,52.325 64.2,52.325 v1(65.525,53.65)
PD2_ERR: DA5A2.5 DD1.17 | length 53.4
  Top Layer w0.3: v1(67.575,36.725) 67.575,38.095 68.005,38.525 68.733,38.525 DA5A2.5@68.883,38.675 ; v1(110.25,41.9) 110.25,41.819 110.6,41.469 DD1.17@110.6,40.525
  Bottom Layer w0.3: v1(67.575,36.725) 69.214,38.364 79.539,38.364 86.325,45.15 109.438,45.15 110.25,44.338 v1(110.25,41.9)
PD3_A: R10A1.2 R11A1.1 XP1.6 | length 9.8
  Top Layer w0.5: 41,44.85 v1(41,45.65) 41,46.475
  Power Layer w0.3: XP1.6@39.975,53.425 40.986,52.414 v1@40.986,45.662
PD3_ADC: C32A1.1 DD1.23 R14A1.2 | length 41.6
  Top Layer w0.3: v1(104.975,42.8) 106.881,42.8 107.6,42.081 DD1.23@107.6,40.525
  Top Layer w0.5: v1(73.9,36.6) C32A1.1@74.775,36.6 ; C32A1.1@74.775,36.625 R14A1.2@76.275,36.625
  Bottom Layer w0.3: v1(73.9,36.6) 75.275,35.225 81.125,35.225 83.675,37.775 88.2,37.775 93.225,42.8 v1(104.975,42.8)
PD3_C: C27A1.2 DA4A1.2 R9A1.1 XP1.5 | length 49.1
  Top Layer w0.5: DA4A1.2@78.2,49.105 78.2,52.275 C27A1.2@78.25,52.325 v1(78.25,53.65) 78.269,53.631 81.694,53.631 R9A1.1@81.95,53.375
  Bottom Layer w0.3: XP1.5@39.975,51.425 41.775,49.625 47.85,49.625 49.395,51.17 67.72,51.17 70.2,53.65 v1(78.25,53.65)
PD3_ERR: DA5A1.5 DD1.18 | length 40.9
  Top Layer w0.3: v1(80.325,36.725) 80.325,38.12 80.73,38.525 81.343,38.525 DA5A1.5@81.492,38.675 ; DD1.18@110.1,40.525 110.1,39.45 v1(110.525,39.025)
  Bottom Layer w0.3: v1(80.325,36.725) 88.05,44.45 105.108,44.45 105.994,43.564 105.994,42.281 107.75,40.525 109.025,40.525 v1(110.525,39.025)
PMO_HW: DA22.1 R116.2 XP9.13 | length 14.6
  Top Layer w0.3: XP9.13@3.6,26.5 12.2,26.5 12.684,26.016 12.684,25.621 13.23,25.075 13.23,24.834 13.688,24.376 13.688,23.177 12.883,22.372 12.883,21.625 DA22.1@12.758,21.5
POWER_IND: DD1.1 R50.2 | length 38.6
  Top Layer w0.3: DD1.1@118.6,40.525 118.6,41.224 118.776,41.4 134.1,41.4 139.7,35.8 151.075,35.8 152.6,37.325 R50.2@153.475,37.325
PS_A: DD1.96 DD3.3 | length 41.2
  Top Layer w0.3: DD1.96@120.125,37 v1(123.85,37)
  Top Layer w0.5: v1(150.675,18.3) 150.678,18.303 150.678,19.697 DD3.3@150.681,19.7
  GND Layer w0.5: v1(123.85,37) 123.85,35.424 126.249,33.025 136.912,33.025 150.675,19.262 v1(150.675,18.3)
PS_D: DD1.95 DD3.2 | length 41.5
  Top Layer w0.3: DD1.95@120.125,36.5 121.825,36.5 122.15,36.175 v1(124.7,36.175)
  Top Layer w0.5: DD3.2@151.981,19.7 151.991,19.691 151.991,18.309 v1(152,18.3)
  GND Layer w0.5: v1(124.7,36.175) 126.7,34.175 137.365,34.175 152,19.54 v1(152,18.3)
PS_ERR1: DD1.66 DD5.14 | length 26.8
  Top Layer w0.3: v1(114.1,24.2) DD1.66@114.1,25.475 ; v1(136.042,22) 136.044,21.998 136.044,20.012 DD5.14@136.046,20.01
  GND Layer w0.3: v1(114.1,24.2) 114.875,24.975 133.067,24.975 v1(136.042,22)
PS_ERR2: DD1.67 DD5.13 | length 28.2
  Top Layer w0.3: v1(114.579,26.85) 114.6,26.829 DD1.67@114.6,25.475 ; v1(137.312,22) 137.314,21.998 137.314,20.012 DD5.13@137.316,20.01
  GND Layer w0.3: v1(114.579,26.85) 114.579,26.769 115.659,25.688 133.624,25.688 v1(137.312,22)
PS_ERR3: DD1.68 DD5.12 | length 30
  Top Layer w0.3: DD1.68@115.1,25.475 115.1,26.4 115.25,26.55 v1(115.25,27.25) ; DD5.12@138.586,20.01 v1(138.586,22)
  GND Layer w0.3: v1(115.25,27.25) 116,28 132.586,28 v1(138.586,22)
PS_ON: DD1.69 DD5.11 | length 28.9
  Top Layer w0.3: DD1.69@115.6,25.475 115.6,24.456 115.775,24.281 v1(115.775,24.2) ; DD5.11@139.856,20.01 v1(139.856,22)
  GND Layer w0.3: v1(115.775,24.2) 130.925,24.2 133.856,21.269 139.125,21.269 v1(139.856,22)
RD_N: DA18.4 R57.1 R60.2 XS1.6 | length 35.9
  Top Layer w0.3: R60.2@181.275,40.525 181.275,40.575 181.698,40.998 182.379,40.998 183.729,42.347 184.635,42.347 185.25,41.732 185.25,40.806 185.19,40.746 185.19,39.394 185.35,39.234 185.35,38.281 184.806,37.737 184.558,37.737 184.382,37.913 184.382,38.575 XS1.6@184.2,38.757
  Top Layer w0.381: R57.1@181.275,39.025 R60.2@181.275,40.525
  Bottom Layer w0.3: DA18.4@182.15,26.275 182.275,26.15 182.772,26.15 182.948,25.974 182.948,25.346 183.448,24.846 185.646,24.846 187.4,26.6 187.4,30.217 188.892,31.708 188.892,31.762 189.035,31.905 189.035,37.167 188.437,37.764 187.948,37.764 186.955,38.757 XS1.6@184.2,38.757
RD_P: DA18.3 R58.1 R63.2 XS1.4 | length 35
  Top Layer w0.3: R58.1@181.275,43.525 R63.2@181.275,42.025 181.275,41.975 181.698,41.552 182.15,41.552 183.499,42.901 184.864,42.901 185.804,41.962 185.804,40.576 185.69,40.462 185.69,39.601 185.85,39.441 185.85,38.074 185.013,37.237 184.558,37.237 184.382,37.062 184.382,36.4 XS1.4@184.2,36.217
  Bottom Layer w0.3: XS1.4@184.2,36.217 186.955,36.217 187.986,37.249 188.223,37.249 188.519,36.953 188.519,32.119 186.846,30.446 186.846,26.829 185.417,25.4 183.678,25.4 183.502,25.576 183.502,25.974 183.678,26.15 184.175,26.15 DA18.3@184.3,26.275
RE/DE: DD1.51 DD10.4 DD10.5 | length 84.8
  Top Layer w0.3: v1(104.55,25.925) 106.6,25.925 DD1.51@106.6,25.475
  Top Layer w0.6: DD10.4@28.6,37.52 28.6,38.15 DD10.5@28.6,38.79
  Top Layer w0.7: 28.6,38.15 v1(30.2,38.15)
  Power Layer w0.3: v1(30.2,38.15) 37.05,38.15 45.1,30.1 99.625,30.1 103.8,25.925 v1(104.55,25.925)
RS485A_HW: DD10.12 R81.1 XP9.5 | length 17.5
  Top Layer w0.3: v1(8.331,37.262) 12.912,37.262 14.8,39.15 R81.1@16.025,39.15 16.385,38.79 DD10.12@19,38.79
  Bottom Layer w0.3: XP9.5@3.6,34.5 4.75,34.5 7.512,37.262 v1(8.331,37.262)
RS485B_HW: DD10.13 R81.2 XP9.6 | length 19.5
  Top Layer w0.3: v1(8.35,36.425) 13.296,36.425 14.021,37.15 R81.2@16.025,37.15 16.395,37.52 DD10.13@19,37.52
  Bottom Layer w0.3: XP9.6@1.6,34.5 2.6,33.5 4.704,33.5 7.629,36.425 v1(8.35,36.425)
Rx485: DD1.48 DD10.3 | length 85.5
  Top Layer w0.3: v1(103.125,27.6) 103.525,28 DD1.48@105.075,28
  Top Layer w0.5: v1(27,36.25) DD10.3@28.6,36.25
  Power Layer w0.3: v1(27,36.25) 27.057,36.307 27.292,36.307 29.77,38.785 37.215,38.785 45.275,30.725 100,30.725 v1(103.125,27.6)
RxCAN: DD1.70 DD6.5 | length 28.1
  Top Layer w0.3: v1(115.925,26.85) 115.925,26.769 116.1,26.594 DD1.70@116.1,25.475
  Bottom Layer w0.3: v1(115.925,26.85) 115.925,26.8 118.437,24.288 136.299,24.288 137.956,22.63 137.956,21.668 138.436,21.188 138.436,20.16 DD6.5@138.586,20.01
RXI_N: DD9.5 R60.1 | length 9.4
  Top Layer w0.3: DD9.5@173.3,36.7 175.031,36.7 176.8,38.469 176.8,40.293 177.465,40.958 178.243,40.958 178.675,40.525 R60.1@179.725,40.525
RXI_P: DD9.6 R63.1 | length 9.5
  Top Layer w0.3: DD9.6@173.3,37.2 174.824,37.2 176.3,38.676 176.3,40.5 177.257,41.458 178.258,41.458 178.825,42.025 R63.1@179.725,42.025
SWCLK: DD1.76 XP3.2 | length 9.4
  Top Layer w0.3: v1(120.125,26.45) DD1.76@120.125,27
  Power Layer w0.3: XP3.2@115.865,19.4 120.125,23.66 v1(120.125,26.45)
SWDIO: DD1.72 XP3.4 | length 8.3
  Top Layer w0.3: XP3.4@113.325,19.4 114.625,20.7 114.625,22.996 115.119,23.49 116.215,23.49 117.1,24.375 DD1.72@117.1,25.475
T1: R17A4.2 R18A4.1 XP1.7 | length 5.4
  Top Layer w0.5: XP1.7@37.975,51.425 37.975,50.35 39.128,49.197 R18A4.1@39.128,47.972 39.103,47.947 39.103,46.597 R17A4.2@39.078,46.572
T1_ADC: C36A4.1 DD1.26 R18A4.2 | length 75.6
  Top Layer w0.3: v1(103.125,39) DD1.26@105.075,39
  Top Layer w0.5: v1(37.578,48.997) R18A4.2@37.578,47.972 37.603,47.947 37.603,46.597 C36A4.1@37.628,46.572
  GND Layer w0.3: v1@37.65,49 37.65,46.275 42.125,41.8 100.325,41.8 v1(103.125,39)
T2: R17A5.2 R18A5.1 XP1.9 | length 5
  Top Layer w0.5: XP1.9@35.975,51.425 35.975,51.181 36.225,50.931 36.225,46.625 R17A5.2@36.175,46.575
T2_ADC: C36A5.1 DD1.29 R18A5.2 | length 78.8
  Top Layer w0.3: v1(103.125,37.5) DD1.29@105.075,37.5
  Top Layer w0.5: v1(34.675,49) R18A5.2@34.675,47.975 34.725,47.925 C36A5.1@34.725,46.575
  GND Layer w0.3: v1(34.675,49) 34.675,46.925 40.575,41.025 99.6,41.025 v1(103.125,37.5)
TD_N: DA18.6 R55.1 R59.2 XS1.3 | length 25.1
  Top Layer w0.3: R59.2@181.275,32.507 181.454,32.507 181.698,32.751 182.197,32.751 182.5,32.447 182.5,31.599 183.554,30.546 188.046,30.546 189,31.5 189,33.183 188.229,33.954 187.125,33.954 186.949,34.13 186.949,34.738 XS1.3@186.74,34.947
  Top Layer w0.381: R55.1@181.275,30.778 R59.2@181.275,32.277
  Bottom Layer w0.3: DA18.6@182.15,28.175 182.275,28.3 182.772,28.3 182.948,28.476 182.948,29.331 185.25,31.633 185.25,32.812 186.531,34.093 186.531,34.738 XS1.3@186.74,34.947
TD_P: DA18.1 R56.1 R62.2 XS1.1 | length 20.6
  Top Layer w0.3: R62.2@181.275,33.778 181.275,33.728 181.698,33.305 182.426,33.305 183.054,32.676 183.054,31.829 183.783,31.1 187.817,31.1 188.446,31.729 188.446,32.954 188,33.4 187.447,33.4 187.271,33.225 187.271,32.939 XS1.1@186.74,32.407
  Top Layer w0.381: R62.2@181.275,33.778 R56.1@181.275,35.278
  Bottom Layer w0.3: DA18.1@184.3,28.175 184.175,28.3 183.678,28.3 183.502,28.476 183.502,29.102 185.804,31.404 185.804,31.682 185.98,31.857 186.19,31.857 XS1.1@186.74,32.407
Tx485: DD1.47 DD10.6 | length 84.5
  Top Layer w0.3: v1(27,40.05) v1@27.005,40.055 ; DD10.6@28.5,40.055 28.595,40.055 DD10.6@28.6,40.06 ; v1(103.125,28.5) 104.362,28.5 DD1.47@105.075,28.5
  Top Layer w0.5: v1@27.005,40.055 DD10.6@28.5,40.055
  Power Layer w0.3: v1(27,40.05) 27.675,39.375 37.45,39.375 45.5,31.325 100.3,31.325 v1(103.125,28.5)
TxCAN: DD1.71 DD6.6 | length 28.6
  Top Layer w0.3: DD1.71@116.6,25.475 116.6,26.544 116.825,26.769 v1(116.825,26.85)
  Bottom Layer w0.3: v1(116.825,26.85) 116.825,26.8 118.887,24.738 137.212,24.738 139.231,22.719 139.231,21.753 139.706,21.278 139.706,20.16 DD6.6@139.856,20.01
TXO_N: DD9.2 R59.1 | length 9.4
  Top Layer w0.3: DD9.2@173.3,35.2 174.827,35.2 174.838,35.2 175.042,34.996 175.114,34.924 ; 175.115,34.923 ccw(c175.681,35.488) 176.247,34.923 176.437,35.112 cw(c176.631,34.918) 176.826,35.112 cw(c176.631,34.918) 176.826,34.723 176.636,34.534 ccw(c177.202,33.968) 176.636,33.402 177.033,33.005 177.338,32.7 177.44,32.7 178.2,32.7 178.623,32.277 R59.1@179.725,32.277
TXO_P: DD9.3 R62.1 | length 9.5
  Top Layer w0.3: DD9.3@173.3,35.7 175.045,35.7 175.186,35.559 175.396,35.349 175.469,35.276 ccw(c175.681,35.488) 175.893,35.276 176.083,35.466 cw(c176.631,34.918) 177.179,35.466 cw(c176.631,34.918) 177.181,34.371 176.989,34.18 ccw(c177.202,33.968) 176.989,33.756 177.387,33.359 177.545,33.2 177.94,33.2 178.2,33.2 178.778,33.778 R62.1@179.725,33.778
XSCI: DD9.12 R66.2 R68.1 | length 11
  Top Layer w0.3: R68.1@169.3,47.2 169.3,45.5 169.9,44.9 R66.2@171.025,44.9 171.149,44.776 171.149,44.151 171.5,43.8 172.934,43.8 173.9,42.834 173.9,40.2 DD9.12@173.3,40.2
XSCO: C84.1 DD9.11 R66.1 ZQ3.1 | length 11.4
  Top Layer w0.3: DD9.11@173.3,39.7 174.345,39.7 174.665,40.02 174.665,43.535 173.3,44.9 R66.1@172.575,44.9 172.575,46.575 ZQ3.1@172.7,46.7 172.7,46.75 173.15,47.2 C84.1@174.375,47.2
pads on no net: DA1.3 DA1.5 DA1.8 DA2.5 DA2.8 DA4A1.5 DA4A2.5 DA4A3.5 DA20.3 DA20.5 DA20.8 DD1.83 DD1.84 DD1.85 DD1.86 DD1.87 DD1.97 DD1.98 DD4.1 DD6.1 DD6.4 DD6.10 DD6.14 DD6.15 DD8.1 DD9.18 DD9.19 DD9.21 DD9.34 DD9.35 DD9.37 DD9.38 DD9.39 DD9.40 DD9.41 DD9.42 DD9.43 DD9.44 DD10.10 DD10.11 DD10.14 DD11.7 XP3.6 XP7.7 XP7.8 XS1. XS1.7 XS1.8
copper on no net: | length 120.4
  Top Layer w0.3: 171.1,23.4 171.181,23.319 172.881,23.319 173.1,23.1
  Top Layer w0.5: 165.1,22.1 165.1,23.4 ; 171.1,20.85 171.1,22.1 171.1,23.4
  Top Layer w1: 91.275,47.5 91.3,47.525 v1(93,47.525)
  Power Layer w1: v1(93,47.525) 93,49.55 97.45,54 104.925,54 108.775,50.15 128.725,50.15 153.4,25.475 163.5,25.475 166.475,28.45 176.7,28.45 185.25,19.9

## Polygon pours and split planes (outlines as drawn)
AGND on Top Layer "AGND_L01_P017" (solid, remove dead copper, pour order 17): 34,55 34,22.275 38.275,18 93,18 93,30.5 88.375,35.125 88.375,55
GND on Top Layer "GND_L01_P006" (solid, remove dead copper, pour order 6): 190.825,15.875 190.825,22.125 193.2,24.5 200,24.5 200,45.497 193,45.497 190.5,47.997 190.5,54.997 158.75,54.997 158.75,42.5 143,42.5 143,55 104.375,55 104.375,48.375 102,46 97.875,46 95.5,48.375 95.5,55 90.625,55 90.625,35.25 94.917,30.958 94.917,17.95 94.917,17.5 94.917,17.434 104.375,7.976 104.375,0 128.5,0 128.5,13.5 133,18 152,18 159.925,18 164.175,13.75 181.425,13.75 183.55,15.875
GND_DRVA7 on Top Layer "GND_DRVA7_L01_P023" (solid, remove dead copper, pour order 23): 66.75,15.5 66.75,0 89.25,0 89.25,15.5
GND on Top Layer "NONET_L-01_P-001" (solid, remove dead copper, pour order 24): 25.5,55 32,55 32,9.3 25.5,9.3
GND_DRVA8 on Top Layer "GND_DRVA8_L01_P022" (solid, remove dead copper, pour order 22): 39.75,15.5 36.322,12.072 36.322,0 59.5,0 59.5,15.5
GND_HW on Top Layer "GND_HW_L01_P008" (solid, remove dead copper, pour order 8): 9,0 9,6.5 6.5,9 0,9 0,46 6,46 9,49 9,55 22,55 22,7.545 17.55,3.095 17.55,0
AGND_HW on Top Layer "NONET_L-01_P-001" (solid, pour order 21): 12.566,29.195 12.566,27.056 13.496,26.126 16.874,26.126 16.874,24.87 18.098,24.87 18.098,26.126 19.253,27.28 19.253,29.195
GND_PS on Top Layer "GND_PS_L01_P013" (solid, remove dead copper, pour order 13): 131.125,0 131.125,13.25 133.375,15.5 155.081,15.5 155.081,0
GND_FS on Top Layer "NONET_L-01_P-001" (solid, remove dead copper, pour order 20): 164.175,11 162.5,9.325 162.5,0 174.25,0 174.25,11
GND_DRVA7 on Bottom Layer "GND_DRVA7_L04_P001" (solid, remove dead copper, pour order 1): 66.75,15.5 66.75,0.003 89.25,0.003 89.25,15.5
GND on Bottom Layer "GND_L04_P009" (solid, remove dead copper, pour order 9): 200,24.5 193.2,24.5 190.61,21.91 180.053,21.91 174.25,16.107 174.25,13.75 164.175,13.75 159.925,18 132.5,18 128.5,14 128.5,0 104.4,0 104.4,7.95 94.35,18 38.374,18 33,12.626 33,9.3 25.5,9.3 25.5,19 25.5,55 32,55 32,26.5 82.5,26.5 90.625,34.625 90.625,55 95.5,55 95.5,48.375 97.877,45.998 101.998,45.998 104.375,48.375 104.375,55 143,55 143,42.5 158.75,42.5 158.75,55 190.5,55 190.5,49 193.502,45.998 200,45.998
GND_DRVA8 on Bottom Layer "GND_DRVA8_L04_P003" (solid, remove dead copper, pour order 3): 39.75,15.5 36.325,12.075 36.325,0 59.503,0 59.503,15.5
GND_HW on Bottom Layer "GND_HW_L04_P015" (solid, remove dead copper, pour order 15): 9,0 9,6.5 6.5,9 0,9 0,46 6,46 9,49 9,55 22,55 22,8.75 18.788,8.75 17.55,7.512 17.55,0
GND_FS on Bottom Layer "NONET_L-01_P-001" (solid, remove dead copper, pour order 19): 164.175,11 162.5,9.325 162.5,0 174.25,0 174.25,11
GND_PS on Bottom Layer "GND_PS_L04_P012" (solid, remove dead copper, pour order 12): 131.125,0 131.125,13.25 133.375,15.5 155.081,15.5 155.081,0
AGND on Bottom Layer "AGND_L04_P005" (solid, remove dead copper, pour order 5): 34,55 34,28.5 52.499,28.5 73.5,28.5 82.25,28.5 88.375,34.625 88.375,55
GND on GND Layer "GND_L03_P018" (solid, remove dead copper, pour order 18): 25.5,55 32,55 32,26.5 75.875,26.5 78.325,28.95 84.95,28.95 90.626,34.626 90.626,55 95.5,55 95.5,48.375 97.877,45.998 101.998,45.998 104.375,48.375 104.375,55 143,55 143,42.497 158.75,42.497 158.75,55 190.5,55 190.5,49 193.502,45.998 200,45.998 200,24.5 193.175,24.5 190.825,22.15 190.825,15.875 183.55,15.875 181.425,13.75 164.175,13.75 159.925,18 133,18 128.5,13.5 128.5,0 104.4,0 104.4,7.95 94.35,18 38.51,18 33,12.49 33,9.3 25.5,9.3